# Altium PCB esp8266.PcbDoc
Units mil, origin at the board's own origin, x right, y up, seen from the top; angles counter-clockwise.
Board outline 2047.24 x 1288.94 mil, 2 copper layers (Top Layer, Bottom Layer); 22 components, 29 nets, 74 pads, 8 vias.
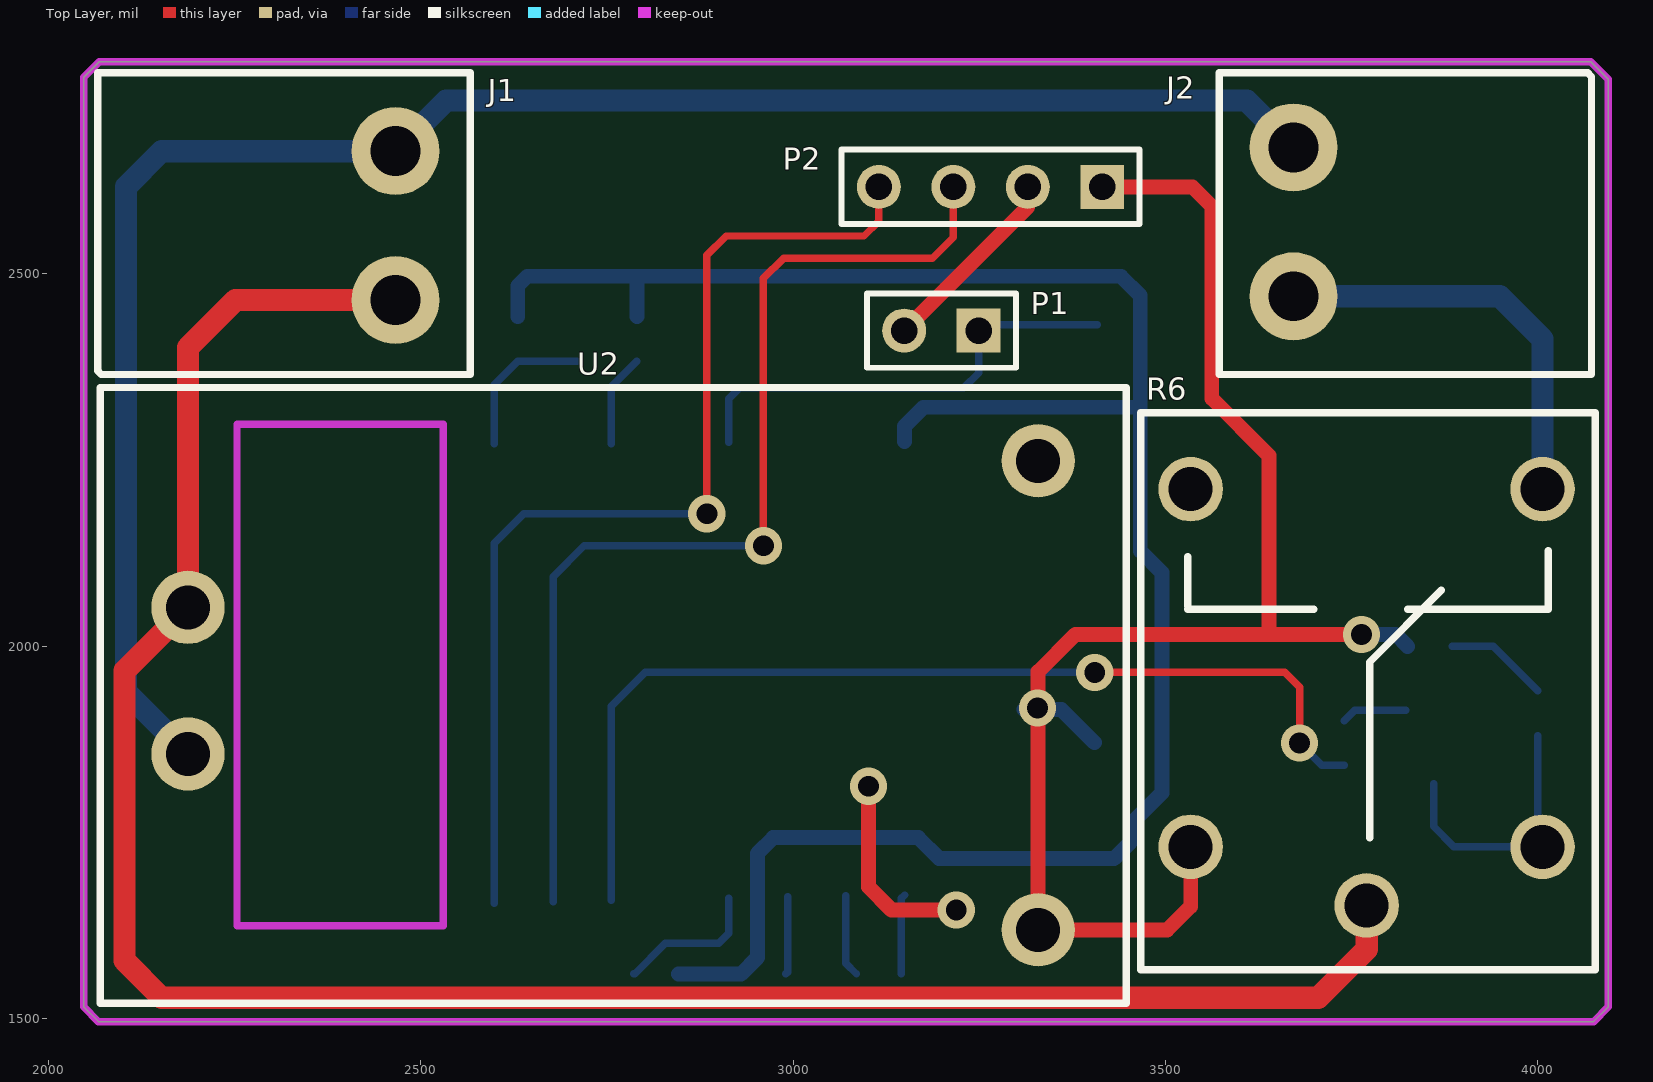
[diagram p0: Top Layer view]
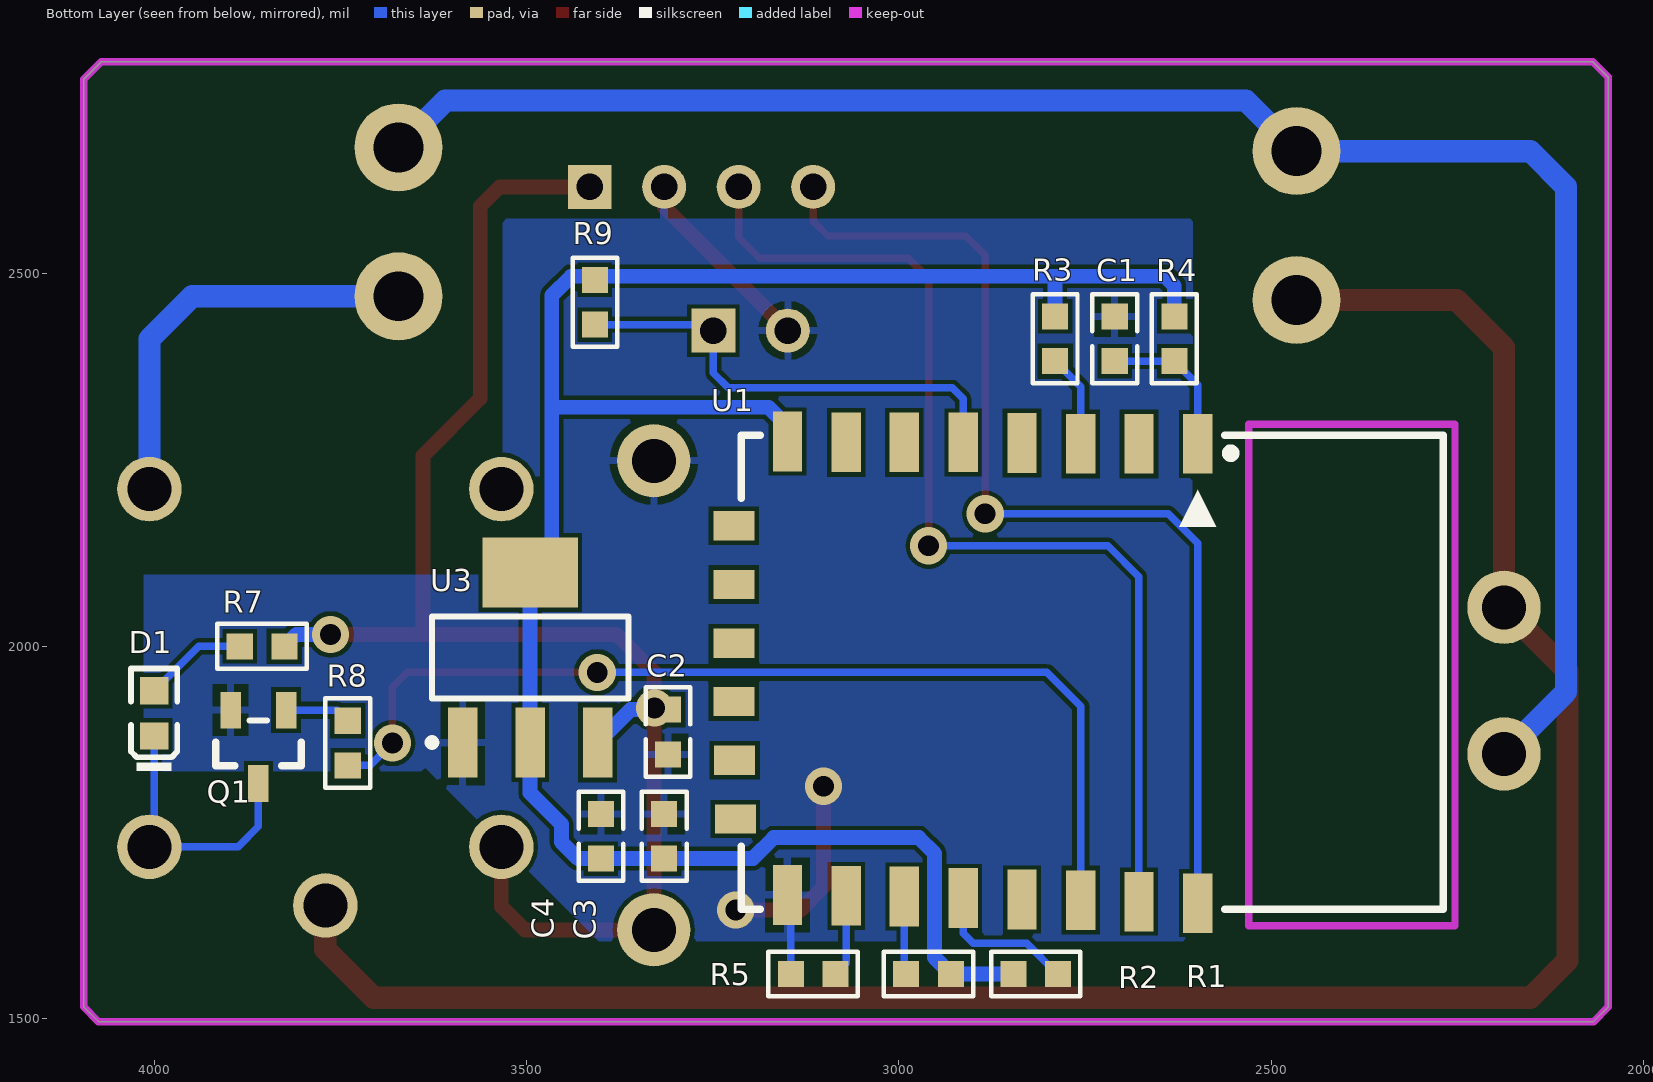
[diagram p1: Bottom Layer view, seen from below]

## Layer stack, top to bottom
Top Solder: solder mask 0.4, Solder Resist, Dk 3.5
Top Layer: signal copper 1.4
Dielectric 1: dielectric 12.6, FR-4, Dk 4.8
Bottom Layer: signal copper 1.4
Bottom Solder: solder mask 0.4, Solder Resist, Dk 3.5

## Board outline
2047.24,1515.75 2047.24,2764.24 2068,2785 4071,2785 4094.49,2761.51 4094.49,1515.75 4074.8,1496.06 2066.93,1496.06

## Design rules (kind name [scope] priority, off if disabled: settings)
Clearance [All] p1: gap=6
PolygonConnect [All] p1: connectstyle=Relief reliefconductorwidth=10 reliefentries=4 polygonreliefangle="90 Angle" airgapwidth=10
RoutingVias [All] p1: holewidth=28 width=50 viastyle="Through Hole" minholewidth=28 minwidth=50 maxholewidth=28 maxwidth=50
SolderMaskExpansion [All] p1: expansion=4
Width [All] p1: maxlimit=30 minlimit=6 preferedwidth=10
29 further rules are at their usual default settings.

## Components (designator, comment, footprint, x,y, rotation, side; value= is the part's Value field where it differs from the comment)
C1 "0.1u" C0603 2710,2413 r270 bottom
C2 "0.1u" C0603 3310,1885 r90 bottom
C3 "10u" C0603 3315,1745 r270 bottom
C4 "0.1u" C0603 3400,1745 r270 bottom
D1 "红灯 0603" 0603_LED_S1 4000,1910 r90 bottom
J1 "CON2" CON_5.08_2 2466,2665 r270 top
J2 "CON2" CON_5.08_2 3672,2470 r90 top
P1 "Header 2" HDR1X2 3249,2424 r180 top
P2 "Header 4" HDR1X4 3415,2617 r180 top
Q1 "SS8050 Y1" SOT-23(SOT-23-3) 3860,1865 r90 bottom
R1 "12k" R0603 2816,1560 r180 bottom
R2 "12k" R0603 2960,1560 r0 bottom
R3 "12k" R0603 2790,2413 r270 bottom
R4 "12k" R0603 2630,2413 r270 bottom
R5 "12k" R0603 3115,1560 r180 bottom
R6 "Relay" HF3FF-JQC-3FF-005 3770,1652 r90 top
R7 "1k" R0603 3855,2000 r180 bottom
R8 "1k" R0603 3740,1870 r90 bottom
R9 "10k" R0603 3408,2462 r90 bottom
U1 "ESP_12_E" ESP8266 2910,1965 r270 bottom
U2 "HLK_PM01-5v" HLK_PM01-5v 3014,2072 r0 top
U3 "AMS1117-3.3" AMS1117 3495,1985 r90 bottom

## Footprints (in the part's own frame and the unit in brackets; to place one, negate y for a bottom-side part, rotate by r counter-clockwise, add the part's x,y. Pads: shape width x height; smd on the part's side, far side on the other; paste and mask are expansions set on the pad)
0603_LED_S1 [mm]
  rect 0.93x0.98 smd: A(0.77,0) K(-0.77,0)
  silkscreen extent -1.98,-0.79 1.54,0.79, body extent -0.8,-0.4 0.8,0.4, height 0.6
AMS1117 [mm]
  rect 2.4x1 smd: 1(-2.9,2.3) 2(-2.9,0) 3(-2.9,-2.3)
  rect 2.4x3.25 smd: 2(2.9,0)
  silkscreen extent -3.02,-3.35 1.4,3.48, body extent -1.85,-3.35 1.85,3.35, height 1.8
C0603 [mil]
  rect 35x35 smd: 1(-30,0) 2(30,0)
  silkscreen extent -60,-30 60,30
CON_5.08_2 [mm]
  round 3 hole 1.7: 1(0,0) 2(5.08,0)
  silkscreen extent -2.67,-10.16 7.62,2.54
ESP8266 [mil]
  rect 80x39.37 smd: 1(-307,311.5) 2(-307,232.5) 3(-307,154.5) 4(-308,75.5) 5(-309,-3.5) 6(-309,-82.5) 7(-309,-160.5) 8(-310,-239.5) 15(299,-239.5) 16(300,-160.5) 17(301,-82.5) 18(303,-3.5) 19(305,75.5) 20(306,154.5) 21(308,232.5) 22(310,311.5)
  rect 39.37x55 smd: 9(-197,-311.5) 10(-118,-311.5) 11(-39,-311.5) 12(39,-311.5) 13(118,-310.5) 14(197,-309.5)
  silkscreen extent -318,-301 318,641, body extent -315,-298 315,647, height 108
HDR1X2 [mm]
  rect 1.5x1.5 hole 0.9: 1(0,0)
  round 1.5 hole 0.9: 2(2.54,0)
  silkscreen extent -1.27,-1.27 3.81,1.27
HDR1X4 [mm]
  rect 1.5x1.5 hole 0.9: 1(0,0)
  round 1.5 hole 0.9: 2(2.54,0) 3(5.08,0) 4(7.62,0)
  silkscreen extent -1.27,-1.27 8.89,1.27
HF3FF-JQC-3FF-005 [mm]
  round 2.2 hole 1.5: 1(0,0) 2(14.2,6) 3(14.2,-6) 4(2,6) 5(2,-6)
  silkscreen extent -2.2,-7.8 16.8,7.7
HLK_PM01-5v [mm]
  round 2.5 hole 1.5: 1(-21,-0.5) 2(-21,-5.5) 3(8,-11.5) 4(8,4.5)
  silkscreen extent -24,-14 11,7
R0603 [mil]
  rect 35x35 smd: 1(-30,0) 2(30,0)
  silkscreen extent -60,-30 60,30
SOT-23(SOT-23-3) [mm]
  rect 1.25x0.7 smd: 1(1.25,-0.95) 2(1.25,0.95) 3(-1.25,0)
  silkscreen extent -0.65,-1.46 0.9,1.46, body extent -1.5,-1.5 1.5,1.5, height 1.3

## Part data
C1 C2 C3 C4: library part Cap_0402
D1: library part "0603 红灯", "发光二极管"
J1 J2: "Connector"
P1: "Header, 2-Pin"
P2: "Header, 4-Pin"
Q1: library part "SOT-23 SS8050 Y1", "三极管"
R1 R2 R3 R4 R5 R7 R8 R9: library part Res_0402
U1: "ESP-12 Wi-Fi Module by AI-Thinker"
U3: library part AMS1117

## Via types
v1: diameter 50, hole 28, Top Layer to Bottom Layer, 8 vias

## Nets (pads, with @x,y where several pads share a name; then routed paths per layer and width w, separated by ;. In a path a pad name is that pad's centre, name@x,y a point inside that pad or via, vN(x,y) a via of type N, cw(c..) or ccw(c..) an arc to the next point about the centre after c; other vN are vias at no path point)
ADC: U1.2
EN: R3.2 U1.3 | length 125.3
  Bottom Layer w10: U1.3 2755.5,2348.5 R3.2
GND: C1.1 C2.1 C3.1 C4.1 P1.2 P2.2 Q1.2 R5.1 U1.15 U2.4 U3.1 | length 635.5
  Top Layer w20: v1(3101,1812) 3101,1677 3132,1646 v1(3219,1646) ; P1.2 3315,2590 P2.2
  Bottom Layer w10: R5.1 3145,1661.5 U1.15
GPIO0: R1.2 U1.18 | length 197.6
  Bottom Layer w10: R1.2 2787,1560 2828,1601 2900,1601 2913.5,1614.5 U1.18
GPIO2: R2.2 U1.17 | length 105
  Bottom Layer w10: R2.2 2992.5,1562.5 U1.17
GPIO4: U1.19
GPIO5: R8.1 U1.20 | length 1359.6
  Top Layer w10: v1(3405,1965) 3660,1965 3680,1945 v1(3680,1870)
  Bottom Layer w10: U1.20 2755.5,1919.5 2801,1965 v1(3405,1965) ; v1(3680,1870) 3710,1840 R8.1
GPIO9: U1.11
GPIO10: U1.12
GPIO12: U1.6
GPIO13: U1.7
GPIO14: P1.1 R9.1 U1.5 | length 627.6
  Bottom Layer w10: U1.5 2913.5,2332.5 2928,2347 3229,2347 3249,2367 P1.1 3257,2432 R9.1
GPIO15: R5.2 U1.16 | length 111
  Bottom Layer w10: U1.16 3070.5,1574.5 R5.2
GPIO16: U1.4
L~: J1.2 R6.1 U2.1 | length 2938.4
  Top Layer w30: J1.2 2251,2465 2187.23,2401.23 U2.1 2102,1967.09 2102,1578 2152,1528 3705,1528 3770,1593 R6.1
NetD1_A: D1.A R7.1 | length 139.7
  Bottom Layer w10: R7.1 3940.32,2000 D1.A
NetD1_K: D1.K Q1.3 R6.5 | length 366.8
  Bottom Layer w10: Q1.3 3860,1758 3887.26,1730.74 R6.5 4000,1736.96 D1.K
NetJ2_1: J2.1 R6.3 | length 559.6
  Bottom Layer w30: J2.1 3949,2470 4006.22,2412.78 R6.3
NetQ1_1: Q1.1 R8.2 | length 88.5
  Bottom Layer w10: R8.2 3754.21,1914.21 Q1.1
NRST: C1.2 R4.2 U1.1 | length 204
  Bottom Layer w10: U1.1 2598.5,2351.5 R4.2 C1.2
N~: J1.1 J2.2 U2.2 | length 2438.2
  Bottom Layer w30: U2.2 2104,1938.69 2104,2617 2152,2665 J1.1 2534,2733 3609,2733 J2.2
RXD0: P2.3 U1.21 | length 1441
  Top Layer w10: v1(2960,2135) 2960,2494 2987,2521 3187,2521 3215,2549 P2.3
  Bottom Layer w10: U1.21 2677.5,2093.5 2719,2135 v1(2960,2135)
SPI_CLK: U1.14
SPI_INT: U1.13
SPI_MISO: U1.10
SPI_MOSI: U1.9
TXD0: P2.4 U1.22 | length 1428.4
  Top Layer w10: v1(2884,2178) 2884,2525 2910,2551 3095,2551 3115,2571 P2.4
  Bottom Layer w10: U1.22 2598.5,2138.5 2638,2178 v1(2884,2178)
VCC5V: C2.2 P2.1 R6.4 R7.2 U2.3 U3.3 | length 2045.4
  Top Layer w20: P2.1 3536,2617 3562,2591 3562,2333 3639,2256 3639,2016 ; R6.4 3533.78,1650.78 3502.24,1619.24 U2.3 3328.96,1965.96 3379,2016 3639,2016 ; v1(3763,2016) 3639,2016
  Bottom Layer w20: C2.2 3360.28,1915 U3.3 ; v1(3763,2016) 3809,2016 R7.2
  other v1: 3328,1917
VDD3V3: C3.2 C4.2 R1.1 R2.1 R3.1 R4.1 R9.2 U1.8 U3.2 | length 2844.5
  Bottom Layer w20: R4.1 2630,2484 2643,2497 2792,2497 ; R3.1 2790,2495 2792,2497 ; R1.1 R2.1 2952,1582 2952,1722 2973,1743 3168,1743 3196,1715 C3.2 C4.2 3431,1715 3453,1737 3453,1761 3495,1803 3495,1870.83 3495,2099.17 3466,2128.17 3466,2321 ; U1.8 3149.5,2295.5 3175,2321 3466,2321 ; 2792,2497 3440,2497 3466,2471 3466,2321
pads on no net: R6.2

## Polygon pours and split planes (outlines as drawn)
GND on Bottom Layer "Keep-Out Layer-No Net" (solid, remove dead copper, pour order 3): 2605,2574 3527,2574 3532,2569 3532,2096 4014,2096 4014,1832 3641,1832 3636,1837 3403,1604 3401,1604 2614,1604 2607,1611

## Keep-outs
Keep-Out Layer:
  lines w10: 2047.24,1515.75 2047.24,2764.24 2068,2785 4071,2785 4094.49,2761.51 4094.49,1515.75 4074.8,1496.06 2066.93,1496.06 2047.24,1515.75 ; 2253,1625 2253,2298 2530,2298 2530,1625 2253,1625

## Text inside footprints (layer, text, board x,y; h text height)
U1: Mechanical 13 "CUTOUT POLYGON" at 2310.5,2221 h10 r90; Mechanical 13 "ANTENNA AREA" at 2290.5,2221 h10 r90